# EAGLE board CapSense (EAGLE 9.1.3)
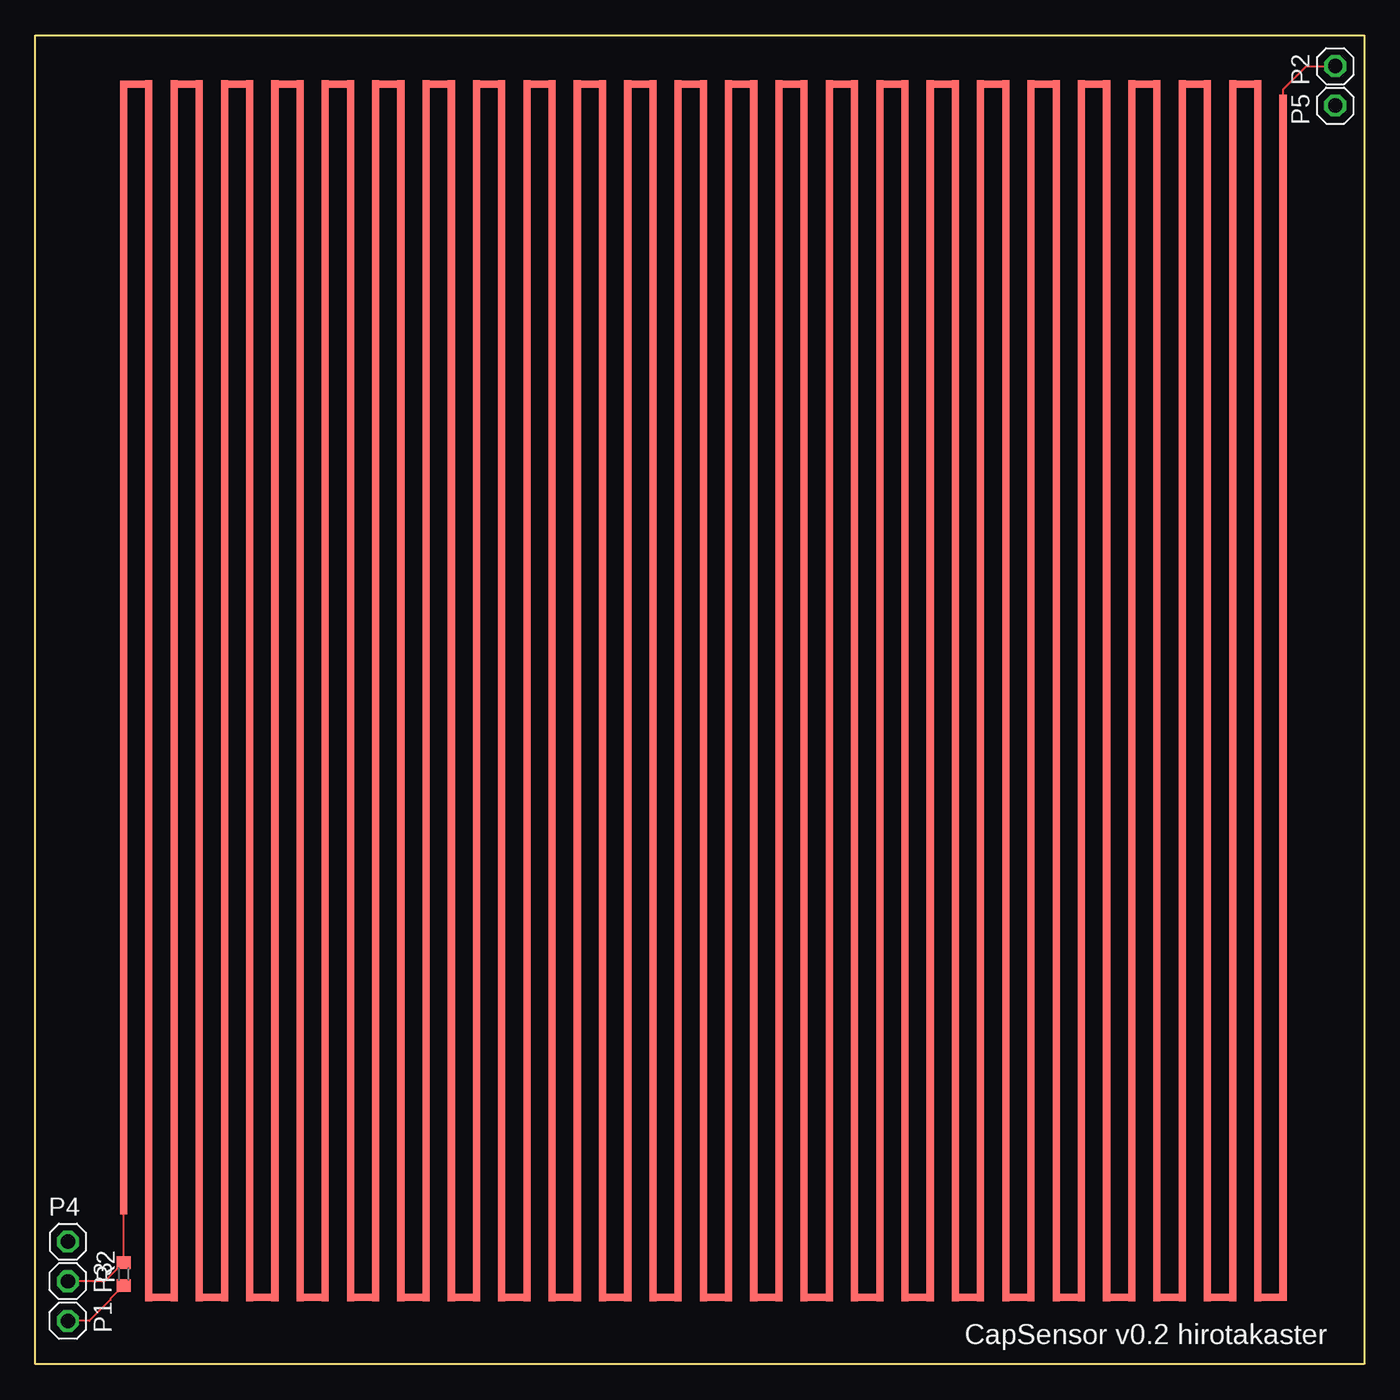
[diagram p0: board, top side]
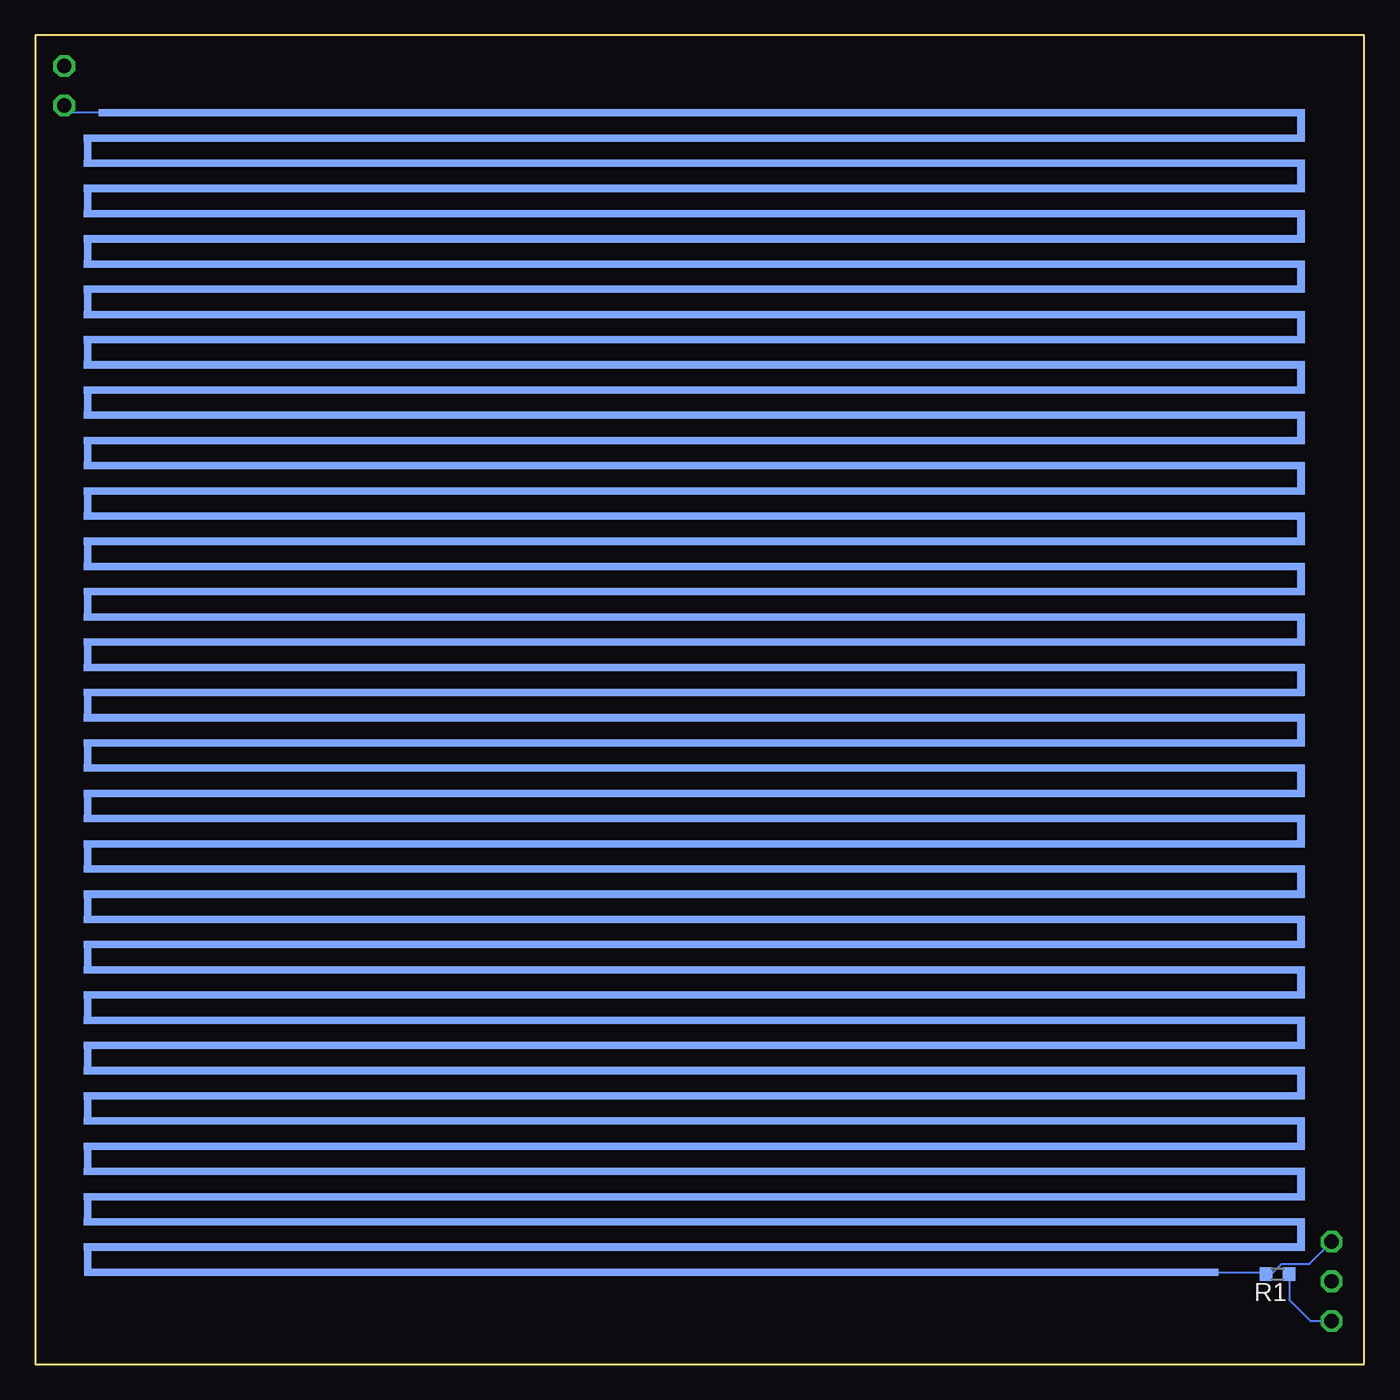
[diagram p1: board, bottom side, seen from below]

Size 93.73 x 93.73 mm. Coordinates in mm from the lower left corner, seen from the top.
Outline: 0,0 0,93.73 93.73,93.73 93.73,0 0,0
Copper layers (1*16): Top 0.035mm / dielectric 1.5mm / Bottom 0.035mm
Design rules "SeeedStudio_2layer_DRU_no_angle_20140221": minimum track width 6mil, minimum drill 12mil, track to track 6mil, track to pad 6mil, pad to pad 6mil, via to via 6mil, smd to smd 0mil, copper to edge 10mil, drill to drill 10mil, minimum pad ring 10mil, minimum via ring 6mil, stop-mask expansion 2mil, vias tented up to drill 100mil, thermal gap 10mil

## Footprints (pad centres in the part's own frame; a part is rotated, then mirrored left to right if it is on the bottom)
LONGPAD_2 = smd 0.5 x 86.127: P$1 10.668,-3.683; P$2 3.556,-3.683; P$4 5.334,-3.683; P$5 12.446,-3.683; P$6 1.778,-3.683; P$7 7.112,-3.683; P$8 23.114,-3.683; P$9 8.89,-3.683; P$10 24.892,-3.683; P$11 14.224,-3.683; P$12 26.67,-3.683; P$13 16.002,-3.683; P$14 28.448,-3.683; P$15 17.78,-3.683; P$16 30.226,-3.683; P$17 19.558,-3.683; P$18 32.004,-3.683; P$19 21.336,-3.683; P$20 33.782,-3.683; P$21 35.56,-3.683; P$22 37.338,-3.683; P$23 39.116,-3.683; P$24 40.894,-3.683; P$25 42.672,-3.683; P$26 44.45,-3.683; P$27 46.228,-3.683; P$28 48.006,-3.683; P$29 49.784,-3.683; P$30 76.454,-3.683; P$31 51.562,-3.683; P$32 78.232,-3.683; P$34 53.34,-3.683; P$35 55.118,-3.683; P$36 56.896,-3.683; P$37 58.674,-3.683; P$38 60.452,-3.683; P$39 62.23,-3.683; P$40 64.008,-3.683; P$41 65.786,-3.683; P$42 67.564,-3.683; P$43 69.342,-3.683; P$44 71.12,-3.683; P$45 72.898,-3.683; P$46 74.676,-3.683; P$47 80.01,-3.683 | smd 0.5 x 80: P$3 0,-0.635 | smd 0.5 x 85.081: P$33 81.788,-4.191 | smd 1.524 x 0.5: P$48 0.889,39.116; P$51 4.445,39.116; P$52 8.001,39.116; P$53 11.557,39.116; P$54 15.113,39.116; P$55 18.669,39.116; P$56 22.225,39.116; P$57 25.781,39.116; P$58 29.337,39.116; P$59 32.893,39.116; P$60 36.449,39.116; P$61 40.005,39.116; P$62 43.561,39.116; P$63 47.117,39.116; P$64 50.673,39.116; P$65 54.229,39.116; P$66 57.785,39.116; P$67 61.341,39.116; P$68 64.897,39.116; P$69 68.453,39.116; P$70 72.009,39.116; P$71 75.565,39.116; P$72 79.121,39.116; P$73 80.899,-46.482; P$74 77.343,-46.482; P$75 73.787,-46.482; P$76 70.231,-46.482; P$77 66.675,-46.482; P$78 63.119,-46.482; P$79 59.563,-46.482; P$80 56.007,-46.482; P$81 52.451,-46.482; P$82 48.895,-46.482; P$83 45.339,-46.482; P$84 41.783,-46.482; P$85 38.227,-46.482; P$86 34.671,-46.482; P$87 31.115,-46.482; P$88 27.559,-46.482; P$89 24.003,-46.482; P$90 20.447,-46.482; P$91 16.891,-46.482; P$92 13.335,-46.482; P$93 9.779,-46.482; P$94 6.223,-46.482; P$95 2.667,-46.482
1X01 = drill 1.016 octagon: 1 0,0
R0603 = smd 0.87 x 0.98: 1 -0.815,0; 2 0.815,0

## Placement (x,y rotation side)
E$1  [LONGPAD_2]  6.22,51.18 0 top
E$2  [LONGPAD_2]  50.93,6.48 90 bottom
P1  [1X01]  2.29,3.05 270 top
P2  [1X01]  91.69,91.57 90 top
P3  [1X01]  2.29,5.84 270 top
P4  [1X01]  2.29,8.64 0 top
P5  [1X01]  91.69,88.77 90 top
R1  [R0603]  6.1,6.35 180 bottom
R2  [R0603]  6.22,6.35 90 top

## Library data of the parts
E$1 E$2 = CAPSENSE
P1-P5 = pinhead
R1 R2 = smd-ipc

## Nets
S$1: P1.1 R1.1 R2.1
S$2: E$2.P$33 P5.1
S$3: E$1.P$33 P2.1
S$5: E$2.P$3 P4.1 R1.2
S$9: E$1.P$3 P3.1 R2.2

## Tracks (layer width: path | path; a pad name or v marks a point on that pad's centre or on a via)
S$1
  Top 0.152: P1.1 3.81,3.05 5.28,4.52 5.28,4.59 R2.1
  Bottom 0.152: R1.1 5.28,4.52 3.81,3.05 P1.1
S$2
  Bottom 0.152: E$2.P$33 91.19,88.27 P5.1
S$3
  Top 0.152: E$1.P$33 88.01,89.92 89.66,91.57 P2.1
S$5
  Bottom 0.152: 6.95,6.39 R1.2 6.53,6.35 5.81,7.07 3.85,7.07 P4.1 | 6.95,6.39 7.04,6.48 | E$2.P$3 7.04,6.48 | 7.04,6.48 6.95,6.39
S$9
  Top 0.152: P3.1 4.9,5.84 R2.2 E$1.P$3

## Text on the board
tNames: CapSensor v0.2 hirotakaster